# EAGLE board ppLight-quad (EAGLE 7.2.0)
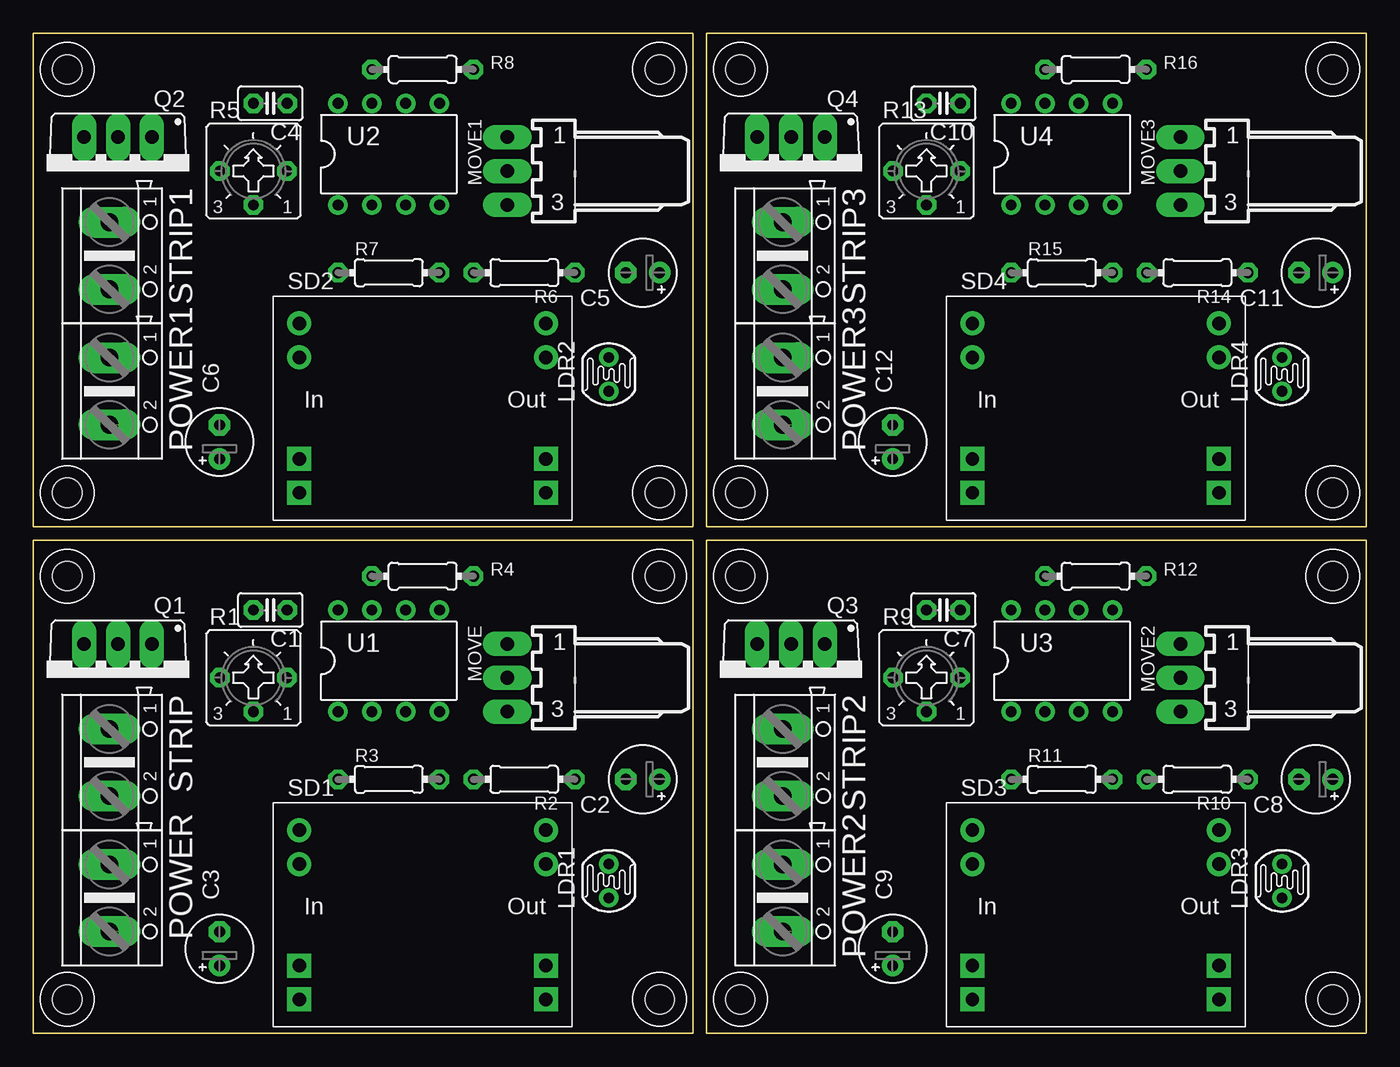
[diagram p0: board, top side]
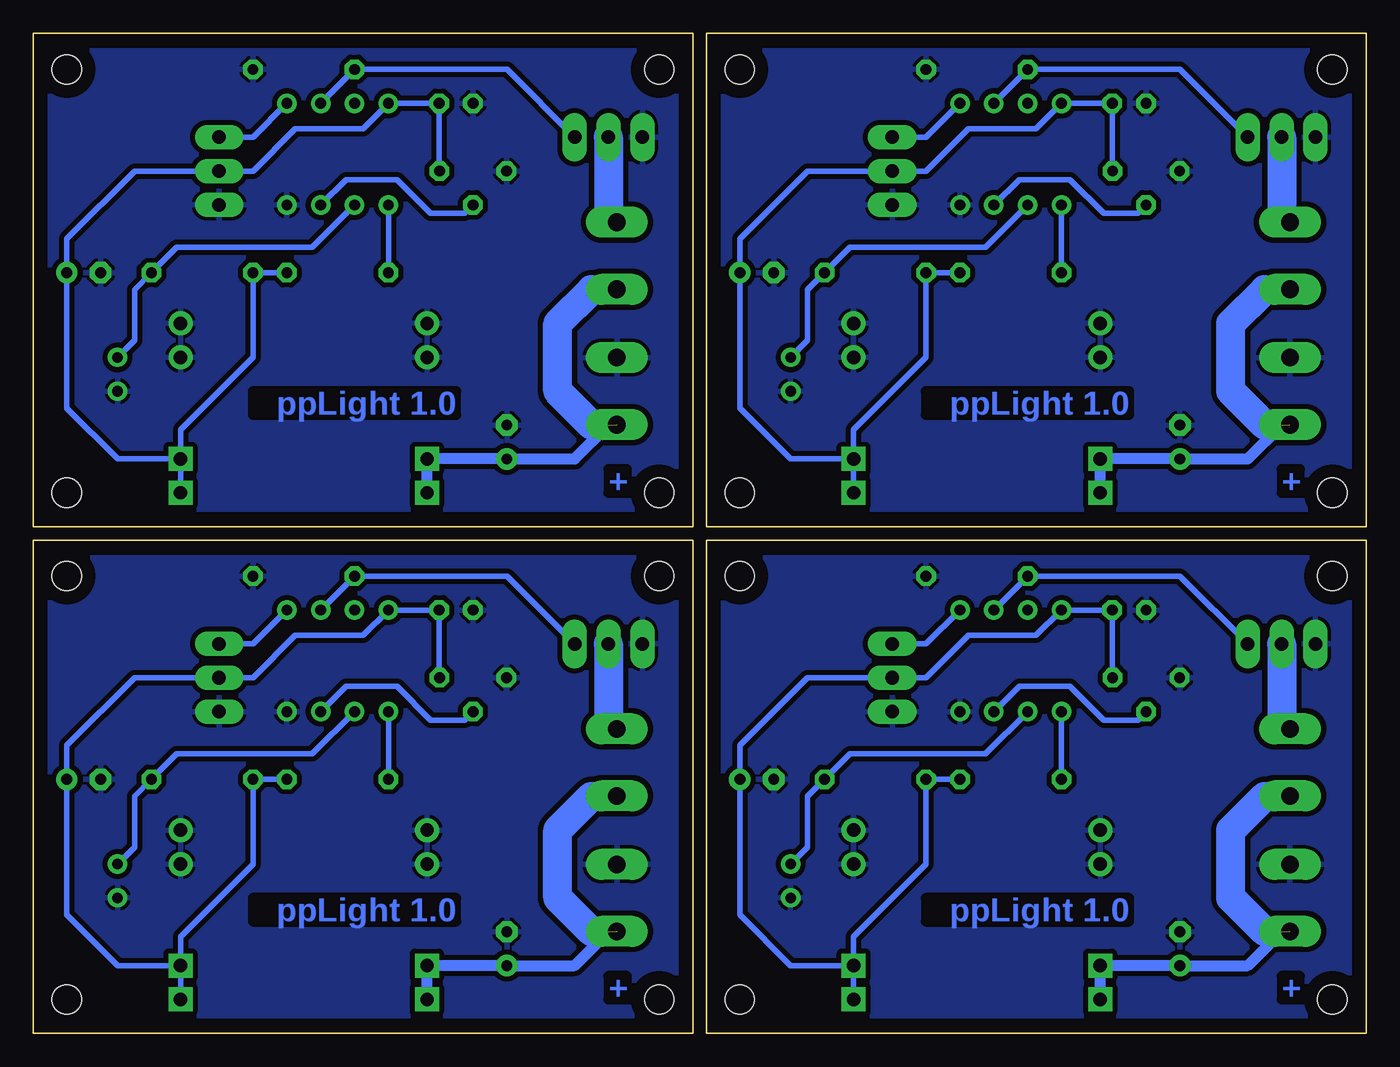
[diagram p1: board, bottom side, seen from below]

Size 100 x 75 mm. Coordinates in mm from the lower left corner, seen from the top.
Outline: 0,0 49.5,0 49.5,37 0,37 0,0
Outline: 0,38 49.5,38 49.5,75 0,75 0,38
Outline: 50.5,0 100,0 100,37 50.5,37 50.5,0
Outline: 50.5,38 100,38 100,75 50.5,75 50.5,38
Copper layers (1*16): Top 0.035mm / dielectric 1.5mm / Bottom 0.035mm
Design rules "default *": minimum track width 10mil, minimum drill 24mil, track to track 15mil, track to pad 15mil, pad to pad 15mil, via to via 15mil, smd to smd 8mil, copper to edge 40mil, drill to drill 8mil, minimum pad ring 10mil, minimum via ring 8mil, stop-mask expansion 4mil, vias tented up to drill 0mil, thermal gap 10mil
Holes 2.2 mm at 46.99,2.54 46.99,34.29 2.54,34.29 2.54,2.54 46.99,40.54 46.99,72.29 2.54,72.29 2.54,40.54 97.49,2.54 97.49,34.29 53.04,34.29 53.04,2.54 97.49,40.54 97.49,72.29 53.04,72.29 53.04,40.54

## Footprints (pad centres in the part's own frame; a part is rotated, then mirrored left to right if it is on the bottom)
C025-025X050 = drill 0.813 octagon: 1 -1.27,0; 2 1.27,0
E2,5-5 = drill 0.813 pad 1.6: + -1.27,0 | drill 0.813 pad 1.6 octagon: - 1.27,0
VT900 = drill 0.8 pad 1.4: 1 -1.27,0; 2 1.27,0
7395-03 = drill 1.016 long: 1 2.54,0; 2 0,0; 3 -2.54,0
AK500/2 = drill 1.321 long: 1 -2.515,0; 2 2.515,0
TO220BV = drill 1.016 long: D 0,-2.54; G -2.54,-2.54; S 2.54,-2.54
CT6 = drill 0.813 octagon: A 2.515,0; E -2.515,0; S 0,-2.54
0204/7 = drill 0.813 octagon: 1 -3.81,0; 2 3.81,0
STEPDOWN-21X16 = drill 1 square: IN+1 -9.25,-3.81; IN+2 -9.25,-6.35; OUT+1 9.25,-3.81; OUT+2 9.25,-6.35 | drill 1: IN-1 -9.25,6.35; IN-2 -9.25,3.81; OUT-1 9.25,6.35; OUT-2 9.25,3.81
PDIP08_300MIL = drill 0.813: 1 -3.81,-3.81; 2 -1.27,-3.81; 3 1.27,-3.81; 4 3.81,-3.81; 5 3.81,3.81; 6 1.27,3.81; 7 -1.27,3.81; 8 -3.81,3.81

## Placement (x,y rotation side)
C1  100nF  [C025-025X050]  17.78,31.75 180 top
C2  100µF  [E2,5-5]  45.72,19.05 180 top
C3  100µF  [E2,5-5]  13.97,6.35 90 top
C4  100nF  [C025-025X050]  17.78,69.75 180 top
C5  100µF  [E2,5-5]  45.72,57.05 180 top
C6  100µF  [E2,5-5]  13.97,44.35 90 top
C7  100nF  [C025-025X050]  68.28,31.75 180 top
C8  100µF  [E2,5-5]  96.22,19.05 180 top
C9  100µF  [E2,5-5]  64.47,6.35 90 top
C10  100nF  [C025-025X050]  68.28,69.75 180 top
C11  100µF  [E2,5-5]  96.22,57.05 180 top
C12  100µF  [E2,5-5]  64.47,44.35 90 top
LDR1  10k  [VT900]  43.18,11.43 270 top
LDR2  10k  [VT900]  43.18,49.43 270 top
LDR3  10k  [VT900]  93.68,11.43 270 top
LDR4  10k  [VT900]  93.68,49.43 270 top
MOVE  [7395-03]  35.56,26.67 90 top
MOVE1  [7395-03]  35.56,64.67 90 top
MOVE2  [7395-03]  86.06,26.67 90 top
MOVE3  [7395-03]  86.06,64.67 90 top
POWER  [AK500/2]  5.71,10.16 270 top
POWER1  [AK500/2]  5.71,48.16 270 top
POWER2  [AK500/2]  56.22,10.16 270 top
POWER3  [AK500/2]  56.22,48.16 270 top
Q1  IRF540  [TO220BV]  6.35,26.67 180 top
Q2  IRF540  [TO220BV]  6.35,64.67 180 top
Q3  IRF540  [TO220BV]  56.85,26.67 180 top
Q4  IRF540  [TO220BV]  56.85,64.67 180 top
R1  500R  [CT6]  16.51,26.67 0 top
R2  1k  [0204/7]  36.83,19.05 180 top
R3  10k  [0204/7]  26.67,19.05 0 top
R4  10k  [0204/7]  29.21,34.29 0 top
R5  500R  [CT6]  16.51,64.67 0 top
R6  1k  [0204/7]  36.83,57.05 180 top
R7  10k  [0204/7]  26.67,57.05 0 top
R8  10k  [0204/7]  29.21,72.29 0 top
R9  500R  [CT6]  67.01,26.67 0 top
R10  1k  [0204/7]  87.33,19.05 180 top
R11  10k  [0204/7]  77.17,19.05 0 top
R12  10k  [0204/7]  79.71,34.29 0 top
R13  500R  [CT6]  67.01,64.67 0 top
R14  1k  [0204/7]  87.33,57.05 180 top
R15  10k  [0204/7]  77.17,57.05 0 top
R16  10k  [0204/7]  79.71,72.29 0 top
SD1  D-SUN-STEPDOWN  [STEPDOWN-21X16]  29.21,8.89 0 top
SD2  D-SUN-STEPDOWN  [STEPDOWN-21X16]  29.21,46.89 0 top
SD3  D-SUN-STEPDOWN  [STEPDOWN-21X16]  79.71,8.89 0 top
SD4  D-SUN-STEPDOWN  [STEPDOWN-21X16]  79.71,46.89 0 top
STRIP  [AK500/2]  5.71,20.32 270 top
STRIP1  [AK500/2]  5.71,58.32 270 top
STRIP2  [AK500/2]  56.22,20.32 270 top
STRIP3  [AK500/2]  56.22,58.32 270 top
U1  ATTINY85-P  [PDIP08_300MIL]  26.67,27.94 0 top
U2  ATTINY85-P  [PDIP08_300MIL]  26.67,65.94 0 top
U3  ATTINY85-P  [PDIP08_300MIL]  77.17,27.94 0 top
U4  ATTINY85-P  [PDIP08_300MIL]  77.17,65.94 0 top

## Library data of the parts
C1-C12 R2-R4 R6-R8 R10-R12 R14-R16 = rcl
LDR1-LDR4 = photo-elements
MOVE MOVE1-MOVE3 = con-molex; OC_FARNELL: unknown; OC_NEWARK: unknown
POWER POWER1-POWER3 STRIP STRIP1-STRIP3 = con-ptr500; OC_FARNELL: unknown; OC_NEWARK: unknown
Q1-Q4 = transistor-power
R1 R5 R9 R13 = pot
SD1-SD4 = Zap-Powerconverters
U1-U4 = _hhn_attiny25_45_85

## Nets
+5V: C1.1 C2.+ MOVE.2 R1.A R2.2 R3.2 SD1.OUT+1 SD1.OUT+2 U1.8
+5V1: C4.1 C5.+ MOVE1.2 R5.A R6.2 R7.2 SD2.OUT+1 SD2.OUT+2 U2.8
+5V2: C7.1 C8.+ MOVE2.2 R9.A R10.2 R11.2 SD3.OUT+1 SD3.OUT+2 U3.8
+5V3: C10.1 C11.+ MOVE3.2 R13.A R14.2 R15.2 SD4.OUT+1 SD4.OUT+2 U4.8
+12V: C3.+ POWER.2 SD1.IN+1 SD1.IN+2 STRIP.2
+12V1: C6.+ POWER1.2 SD2.IN+1 SD2.IN+2 STRIP1.2
+12V2: C9.+ POWER2.2 SD3.IN+1 SD3.IN+2 STRIP2.2
+12V3: C12.+ POWER3.2 SD4.IN+1 SD4.IN+2 STRIP3.2
GND: C1.2 C2.- C3.- LDR1.2 MOVE.3 POWER.1 Q1.S R1.E R4.2 SD1.IN-1 SD1.IN-2 SD1.OUT-1 SD1.OUT-2 U1.4
GND1: C4.2 C5.- C6.- LDR2.2 MOVE1.3 POWER1.1 Q2.S R5.E R8.2 SD2.IN-1 SD2.IN-2 SD2.OUT-1 SD2.OUT-2 U2.4
GND2: C7.2 C8.- C9.- LDR3.2 MOVE2.3 POWER2.1 Q3.S R9.E R12.2 SD3.IN-1 SD3.IN-2 SD3.OUT-1 SD3.OUT-2 U3.4
GND3: C10.2 C11.- C12.- LDR4.2 MOVE3.3 POWER3.1 Q4.S R13.E R16.2 SD4.IN-1 SD4.IN-2 SD4.OUT-1 SD4.OUT-2 U4.4
N$1: R1.S U1.3
N$2: Q1.D STRIP.1
N$3: R3.1 U1.1
N$4: Q1.G R4.1 U1.6
N$5: LDR1.1 R2.1 U1.2
N$6: MOVE.1 U1.5
N$7: R7.1 U2.1
N$8: Q2.G R8.1 U2.6
N$9: LDR2.1 R6.1 U2.2
N$10: R5.S U2.3
N$11: Q2.D STRIP1.1
N$12: MOVE1.1 U2.5
N$13: R11.1 U3.1
N$14: Q3.G R12.1 U3.6
N$15: LDR3.1 R10.1 U3.2
N$16: R9.S U3.3
N$17: Q3.D STRIP2.1
N$18: MOVE2.1 U3.5
N$19: R15.1 U4.1
N$20: Q4.G R16.1 U4.6
N$21: LDR4.1 R14.1 U4.2
N$22: R13.S U4.3
N$23: Q4.D STRIP3.1
N$24: MOVE3.1 U4.5

## Tracks (layer width: path | path; a pad name or v marks a point on that pad's centre or on a via)
+5V
  Bottom 0.406: R3.2 R2.2 33.02,12.7 38.46,7.26 SD1.OUT+1 | SD1.OUT+2 SD1.OUT+1 | R1.A 19.05,26.7 C1.1 U1.8 24.77,29.84 29.84,29.84 33.02,26.67 MOVE.2 41.91,26.67 46.99,21.59 C2.+ 46.99,8.89 43.18,5.08 SD1.OUT+1
+5V1
  Bottom 0.406: R7.2 R6.2 33.02,50.7 38.46,45.26 SD2.OUT+1 | SD2.OUT+2 SD2.OUT+1 | R5.A 19.05,64.69 C4.1 U2.8 24.77,67.84 29.84,67.84 33.02,64.67 MOVE1.2 41.91,64.67 46.99,59.59 C5.+ 46.99,46.89 43.18,43.08 SD2.OUT+1
+5V2
  Bottom 0.406: R11.2 R10.2 83.52,12.7 88.96,7.26 SD3.OUT+1 | SD3.OUT+2 SD3.OUT+1 | R9.A 69.55,26.7 C7.1 U3.8 75.27,29.84 80.34,29.84 83.52,26.67 MOVE2.2 92.41,26.67 97.49,21.59 C8.+ 97.49,8.89 93.68,5.08 SD3.OUT+1
+5V3
  Bottom 0.406: R15.2 R14.2 83.52,50.7 88.96,45.26 SD4.OUT+1 | SD4.OUT+2 SD4.OUT+1 | R13.A 69.55,64.69 C10.1 U4.8 75.27,67.84 80.34,67.84 83.52,64.67 MOVE3.2 92.41,64.67 97.49,59.59 C11.+ 97.49,46.89 93.68,43.08 SD4.OUT+1
+12V  (1 unrouted)
  Bottom 0.813: SD1.IN+2 SD1.IN+1 C3.+ 8.89,5.08 6.35,7.62
  Bottom 2.184: POWER.2 7.59,7.64 7.62,7.62 10.16,10.16 10.16,15.24 7.62,17.78 5.74,17.78 STRIP.2
+12V1  (1 unrouted)
  Bottom 0.813: SD2.IN+2 SD2.IN+1 C6.+ 8.89,43.08 6.35,45.62
  Bottom 2.184: POWER1.2 7.59,45.65 7.62,45.62 10.16,48.16 10.16,53.24 7.62,55.78 5.74,55.78 STRIP1.2
+12V2  (1 unrouted)
  Bottom 0.813: SD3.IN+2 SD3.IN+1 C9.+ 59.39,5.08 56.85,7.62
  Bottom 2.184: POWER2.2 58.09,7.64 58.12,7.62 60.66,10.16 60.66,15.24 58.12,17.78 56.24,17.78 STRIP2.2
+12V3  (1 unrouted)
  Bottom 0.813: SD4.IN+2 SD4.IN+1 C12.+ 59.39,43.08 56.85,45.62
  Bottom 2.184: POWER3.2 58.09,45.65 58.12,45.62 60.66,48.16 60.66,53.24 58.12,55.78 56.24,55.78 STRIP3.2
GND
  pour Bottom: 0,0 0,37 49.5,37 49.5,0
GND1
  pour Bottom: 0,38 0,75 49.5,75 49.5,38
GND2
  pour Bottom: 50.5,0 50.5,37 100,37 100,0
GND3
  pour Bottom: 50.5,38 50.5,75 100,75 100,38
N$1
  Bottom 0.406: R1.S 17.14,23.5 19.68,23.5 22.23,26.04 26.04,26.04 U1.3
N$2
  Bottom 2.184: Q1.D 6.35,23.47 STRIP.1
N$3
  Bottom 0.406: U1.1 R3.1
N$4
  Bottom 0.406: U1.6 R4.1 13.97,34.29 Q1.G
N$5
  Bottom 0.406: LDR1.1 41.91,13.97 41.91,17.78 R2.1 38.73,20.95 28.57,20.95 U1.2
N$6
  Bottom 0.406: MOVE.1 33.02,29.21 U1.5
N$7
  Bottom 0.406: U2.1 R7.1
N$8
  Bottom 0.406: U2.6 R8.1 13.97,72.29 Q2.G
N$9
  Bottom 0.406: LDR2.1 41.91,51.97 41.91,55.78 R6.1 38.73,58.95 28.57,58.95 U2.2
N$10
  Bottom 0.406: R5.S 17.14,61.49 19.68,61.49 22.23,64.03 26.04,64.03 U2.3
N$11
  Bottom 2.184: Q2.D 6.35,61.47 STRIP1.1
N$12
  Bottom 0.406: MOVE1.1 33.02,67.21 U2.5
N$13
  Bottom 0.406: U3.1 R11.1
N$14
  Bottom 0.406: U3.6 R12.1 64.47,34.29 Q3.G
N$15
  Bottom 0.406: LDR3.1 92.41,13.97 92.41,17.78 R10.1 89.23,20.95 79.08,20.95 U3.2
N$16
  Bottom 0.406: R9.S 67.64,23.5 70.19,23.5 72.72,26.04 76.53,26.04 U3.3
N$17
  Bottom 2.184: Q3.D 56.85,23.47 STRIP2.1
N$18
  Bottom 0.406: MOVE2.1 83.52,29.21 U3.5
N$19
  Bottom 0.406: U4.1 R15.1
N$20
  Bottom 0.406: U4.6 R16.1 64.47,72.29 Q4.G
N$21
  Bottom 0.406: LDR4.1 92.41,51.97 92.41,55.78 R14.1 89.23,58.95 79.08,58.95 U4.2
N$22
  Bottom 0.406: R13.S 67.64,61.49 70.19,61.49 72.72,64.03 76.53,64.03 U4.3
N$23
  Bottom 2.184: Q4.D 56.85,61.47 STRIP3.1
N$24
  Bottom 0.406: MOVE3.1 83.52,67.21 U4.5

## Text on the board
Bottom: ppLight 1.0 | ppLight 1.0 | + | + | ppLight 1.0 | ppLight 1.0 | + | +